# Altium PCB PCB.PcbDoc (part 2 of 3)
Units mil, origin at the board's own origin, x right, y up, seen from the top; angles counter-clockwise.
Board outline 2000 x 1595 mil, 2 copper layers (Top Layer, Bottom Layer); 191 components, 134 nets, 778 pads, 0 vias.
Unrouted connection lines stored in the file: 439.
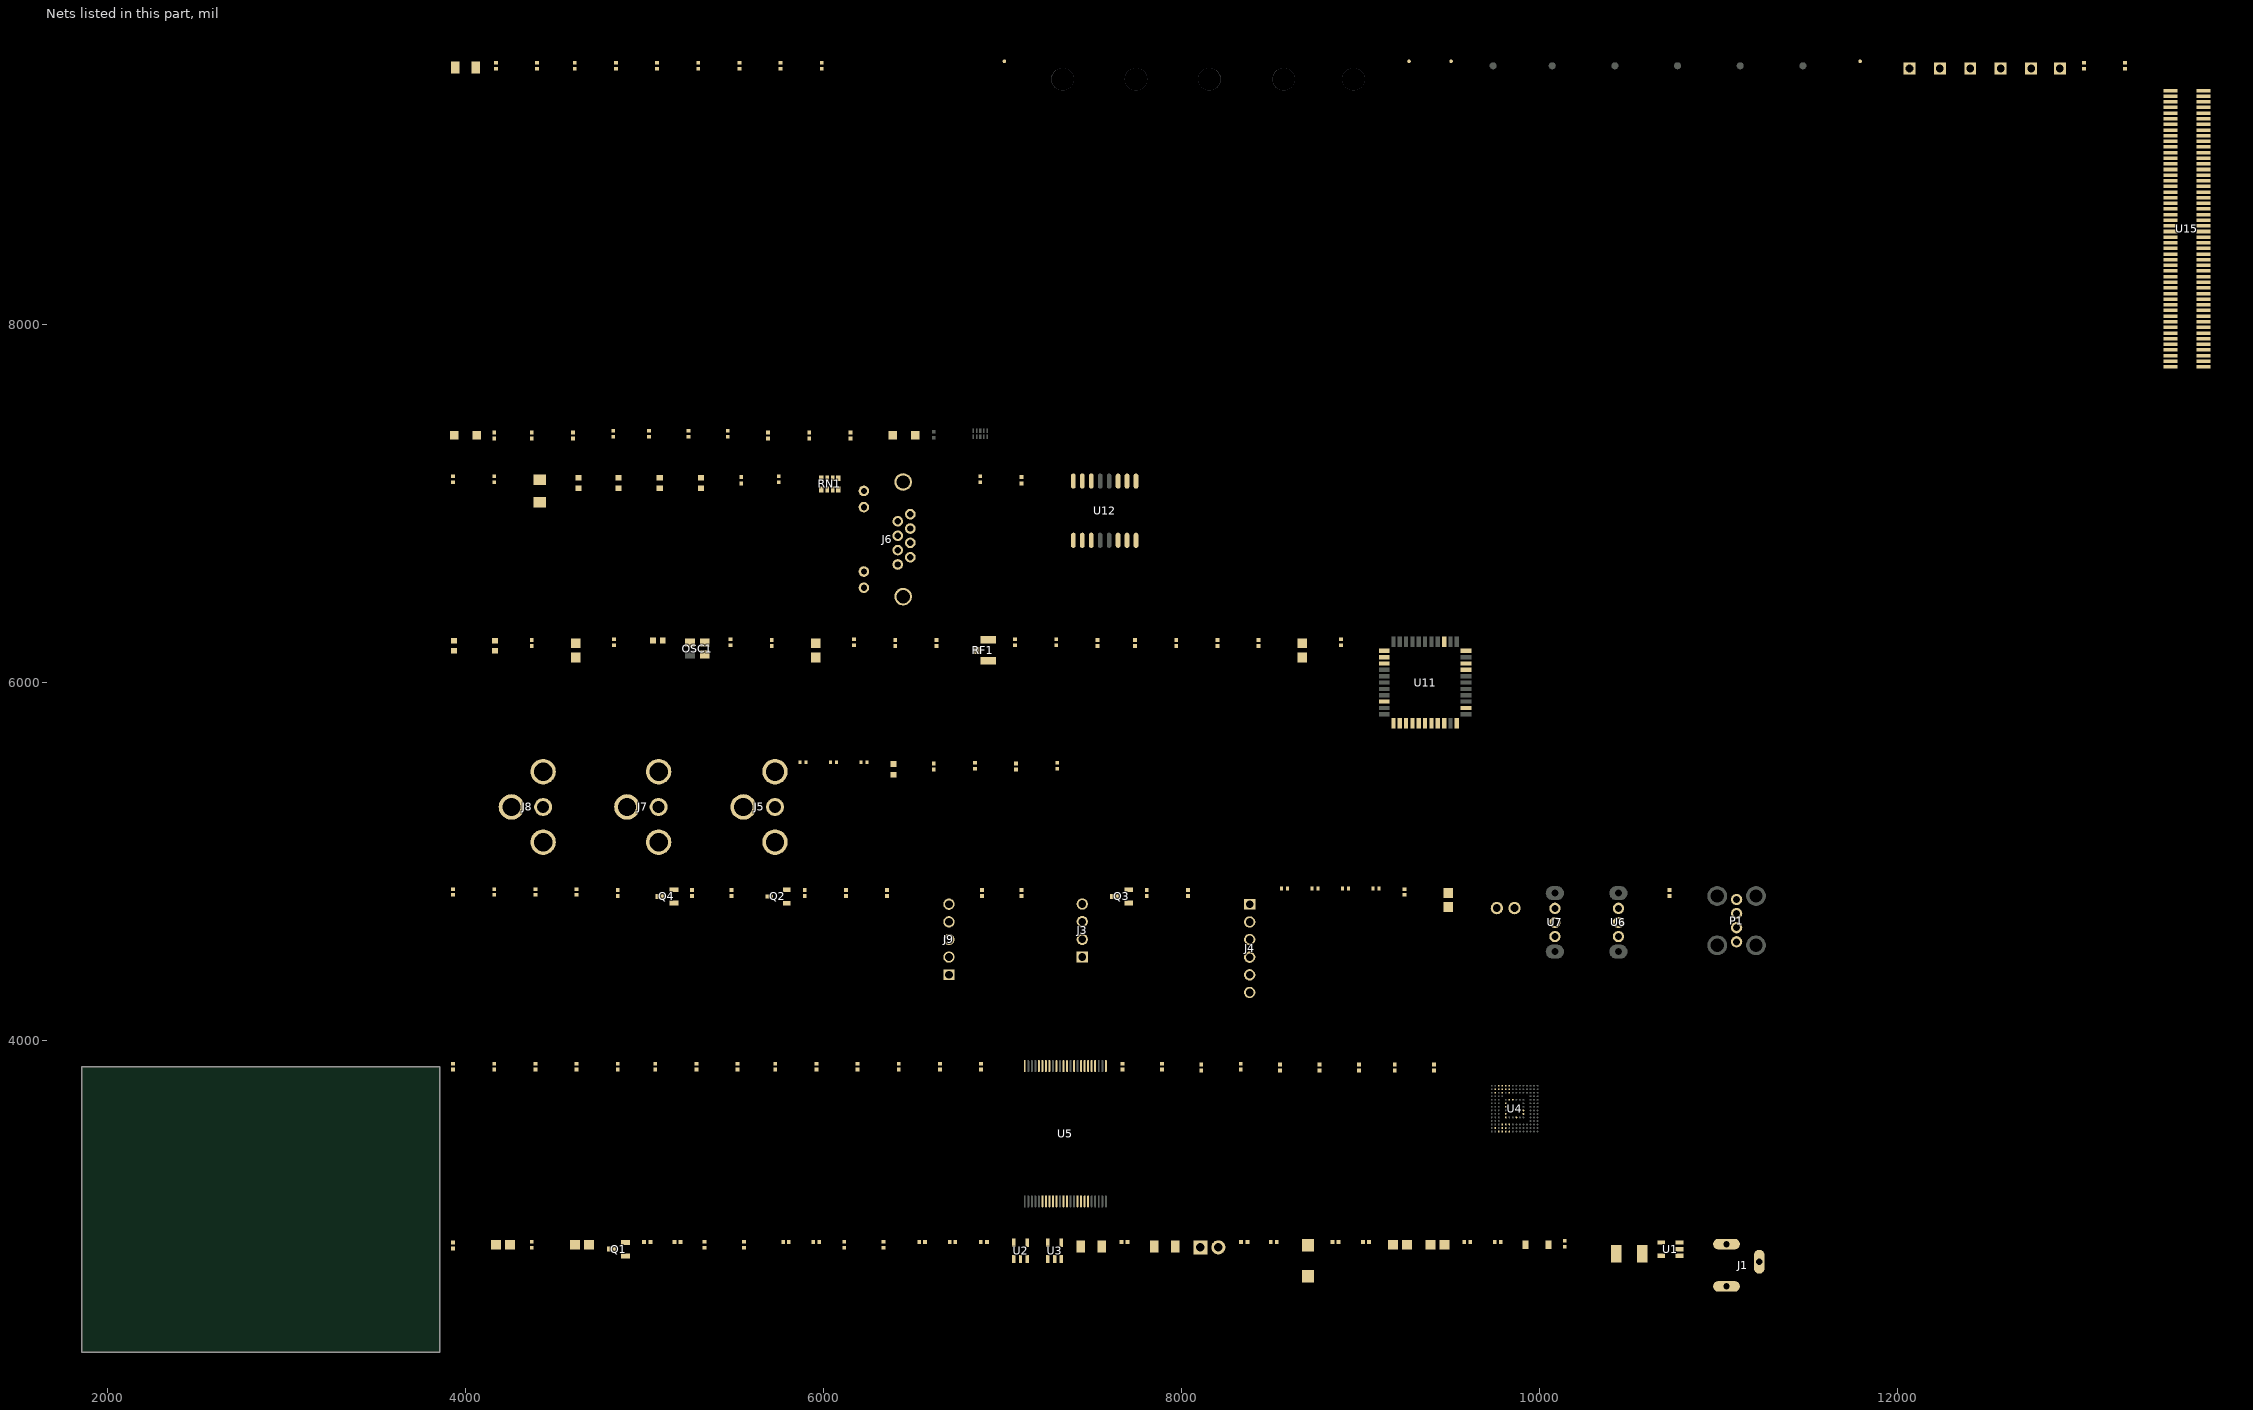
[diagram p2: the nets of this part, all layers, seen from the top]

## Part data
C1 C3 C14 C16 C35 C43 C47 C50: library part CGA0805X5R106K500MT, "容值:10uF;精度:±10%;额定电压:50V;温度系数:X5R;", JLCPCB Part Class="Extended Part", LCSC Part Name="10uF ±10% 50V", Manufacturer=HRE(芯声), Temperature Coefficient=X5R, Tolerance=±10%, Voltage Rating=50V, AddInBom=yes, ConvertToPcb=yes, Datasheet=https://item.szlcsc.com/datasheet/CGA0805X5R106K500MT/7062595.html, Device=CGA0805X5R106K500MT, FootprintName=C0805, ModelName=C0805_L2.0-W1.3-H1.3, Supplier=LCSC, Supplier Footprint=0805, Symbol=CGA0805X5R106K500MT
  C1 C3 C43 C47 C50: 3D Model=1ba041120af144c991958decab20d241聨0819f05c4eef4c71ace90d822a990e87, 3D Model Transform=78.74,51.181,0,0,0,0,0,0.0005,0, Manufacturer Part=CGA0805X5R106K500MT, Supplier Part=C6119889
  C14 C16 C35: ManufacturerPart=CGA0805X5R106K500MT, ModelId=1ba041120af144c991958decab20d241聨0819f05c4eef4c71ace90d822a990e87, ModelTransform=78.74,51.181,0,0,0,0,0,0.0005,0, SupplierPart=C6119889
C2 C4 C8 C11 C12 C13 C15 C17 C18 C20 C23 C24 C25 C26 C29 C30 C31 C32 C33 C36 C44 C45 C46 C48 C49 C51 C52 C53 C55 C56 C57 C58 C62 C63 C64 C65 C66 C67 C68: library part CL05B104KO5NNNC, "容值:100nF;精度:±10%;额定电压:16V;温度系数:X7R;", JLCPCB Part Class="Basic Part", LCSC Part Name="100nF ±10% 16V", Manufacturer=SAMSUNG(三星), Temperature Coefficient=X7R, Tolerance=±10%, Voltage Rating=16V, AddInBom=yes, ConvertToPcb=yes, Datasheet=https://item.szlcsc.com/datasheet/CL05B104KO5NNNC/1877.html, Device=CL05B104KO5NNNC, FootprintName=C0402, ModelName=C0402_L1.0-W0.5-H0.5, Supplier=LCSC, Supplier Footprint=0402, Symbol=CL05B104KO5NNNC
  C2 C4 C20 C23 C24 C25 C26 C30 C31 C32 C33 C44 C48 C51 C52 C53 C55 C56 C57 C58 C62 C63 C64 C65 C66 C67 C68: 3D Model=36a51122f27c49738f86b3bfa98863e0聨0819f05c4eef4c71ace90d822a990e87, 3D Model Transform=39.37,19.685,0,0,0,0,0,0,0, Manufacturer Part=CL05B104KO5NNNC, Supplier Part=C1525
  C8 C11 C15 C17 C18 C29 C36: ManufacturerPart=CL05B104KO5NNNC, ModelId=36a51122f27c49738f86b3bfa98863e0聨0819f05c4eef4c71ace90d822a990e87, ModelTransform=39.37,19.685,0,0,0,0,0,0,0, SupplierPart=C1525
  C12 C13 C49: ManufacturerPart=CL05B104KO5NNNC, ModelId=36a51122f27c49738f86b3bfa98863e0聨0819f05c4eef4c71ace90d822a990e87, ModelTransform=39.37,19.685,0,0,0,0,0,0,0
  C45 C46: 3D Model=36a51122f27c49738f86b3bfa98863e0聨0819f05c4eef4c71ace90d822a990e87, 3D Model Transform=39.37,19.685,0,0,0,0,0,0,0, Manufacturer Part=CL05B104KO5NNNC
C5: library part FCC0402N220J500AT, "容值:22pF;精度:±5%;额定电压:50V;温度系数:C0G;", JLCPCB Part Class="Extended Part", LCSC Part Name="22pF ±5% 50V", Manufacturer=FOJAN(富捷), Temperature Coefficient=C0G, Tolerance=±5%, Voltage Rating=50V, 3D Model=36a51122f27c49738f86b3bfa98863e0聨0819f05c4eef4c71ace90d822a990e87, 3D Model Transform=39.37,19.685,0,0,0,0,0,0,0, AddInBom=yes, ConvertToPcb=yes, Datasheet=https://item.szlcsc.com/datasheet/FCC0402N220J500AT/5747021.html, Device=FCC0402N220J500AT, FootprintName=C0402, Manufacturer Part=FCC0402N220J500AT, ModelName=C0402_L1.0-W0.5-H0.5, Supplier=LCSC, Supplier Footprint=0402, Supplier Part=C5137569, Symbol=FCC0402N220J500AT
C6 C7 C9 C10 C41 C42: library part GRM155C61E475ME15D, "容值:4.7uF;精度:±20%;额定电压:25V;温度系数:-;", JLCPCB Part Class="Extended Part", LCSC Part Name="4.7uF ±20% 25V", Manufacturer=muRata(村田), Temperature Coefficient=-, Tolerance=±20%, Voltage Rating=25V, AddInBom=yes, ConvertToPcb=yes, Datasheet=https://item.szlcsc.com/datasheet/GRM155C61E475ME15D/6643118.html, Device=GRM155C61E475ME15D, FootprintName=C0402, ManufacturerPart=GRM155C61E475ME15D, ModelId=36a51122f27c49738f86b3bfa98863e0聨0819f05c4eef4c71ace90d822a990e87, ModelName=C0402_L1.0-W0.5-H0.5, ModelTransform=39.37,19.685,0,0,0,0,0,0,0, Supplier=LCSC, Supplier Footprint=0402, SupplierPart=C5718966, Symbol=GRM155C61E475ME15D
C19 C21 C22 C27 C28 C59 C60 C61: library part CGA0402X5R105K500GT, "容值:1uF;精度:±10%;额定电压:50V;温度系数:X5R;", JLCPCB Part Class="Extended Part", LCSC Part Name="1uF ±10% 50V", Manufacturer=HRE(芯声), Temperature Coefficient=X5R, Tolerance=±10%, Voltage Rating=50V, AddInBom=yes, ConvertToPcb=yes, Datasheet=https://item.szlcsc.com/datasheet/CGA0402X5R105K500GT/7062517.html, Device=CGA0402X5R105K500GT, FootprintName=C0402, ModelName=C0402_L1.0-W0.5-H0.5, Supplier=LCSC, Supplier Footprint=0402, Symbol=CGA0402X5R105K500GT
  C19 C27 C28: ManufacturerPart=CGA0402X5R105K500GT, ModelId=36a51122f27c49738f86b3bfa98863e0聨0819f05c4eef4c71ace90d822a990e87, ModelTransform=39.37,19.685,0,0,0,0,0,0,0, SupplierPart=C6119811
  C21 C22 C59 C60 C61: 3D Model=36a51122f27c49738f86b3bfa98863e0聨0819f05c4eef4c71ace90d822a990e87, 3D Model Transform=39.37,19.685,0,0,0,0,0,0,0, Manufacturer Part=CGA0402X5R105K500GT, Supplier Part=C6119811
C34: library part PB16V330M6X11, "容值:330uF;精度:±20%;额定电压:16V;纹波电流:4.1A@100kHz;等效串联电阻(ESR):16mΩ@100kHz;类型:聚合物;", Equivalent Series Resistance(ESR)=16mΩ@100kHz, JLCPCB Part Class="Extended Part", LCSC Part Name="330uF ±20% 16V", Manufacturer=JIERR(捷而瑞), Operating Temperature=-55℃~+105℃, Ripple Current=4.1A@100kHz, Tolerance=±20%, Voltage Rating=16V, AddInBom=yes, ConvertToPcb=yes, Datasheet=https://item.szlcsc.com/datasheet/PB16V330M6X11/54649573.html, Device=PB16V330M6X11, Diameter=6.3mm, FootprintName=CAP-TH_BD6.3-P2.50-D0.6-FD-3, Height - Seated (Max)=11mm, Lifetime=5000hrs@105℃, ManufacturerPart=PB16V330M6X11, Pin Spacing=2.5mm, Supplier=LCSC, Supplier Footprint=插件,D6.3xL11mm, SupplierPart=C51934161, Symbol=PB16V330M6X11, Type=聚合物
C37 C38 C39 C40: library part CL05C100JB5NNNC, "容值:10pF;精度:±5%;额定电压:50V;温度系数:C0G;", JLCPCB Part Class="Basic Part", LCSC Part Name="10pF ±5% 50V", Manufacturer=SAMSUNG(三星), Temperature Coefficient=C0G, Tolerance=±5%, Voltage Rating=50V, 3D Model=36a51122f27c49738f86b3bfa98863e0聨0819f05c4eef4c71ace90d822a990e87, 3D Model Transform=39.37,19.685,0,0,0,0,0,0,0, AddInBom=yes, ConvertToPcb=yes, Datasheet=https://item.szlcsc.com/datasheet/CL05C100JB5NNNC/33914.html, Device=CL05C100JB5NNNC, FootprintName=C0402, Manufacturer Part=CL05C100JB5NNNC, ModelName=C0402_L1.0-W0.5-H0.5, Supplier=LCSC, Supplier Footprint=0402, Supplier Part=C32949, Symbol=CL05C100JB5NNNC
C54: library part CL31B105KBHNNNE, "容值:1uF;精度:±10%;额定电压:50V;温度系数:X7R;", JLCPCB Part Class="Basic Part", LCSC Part Name="1uF ±10% 50V", Manufacturer=SAMSUNG(三星), Temperature Coefficient=X7R, Tolerance=±10%, Voltage Rating=50V, AddInBom=yes, ConvertToPcb=yes, Datasheet=https://item.szlcsc.com/datasheet/CL31B105KBHNNNE/2200.html, Device=CL31B105KBHNNNE, FootprintName=C1206, ManufacturerPart=CL31B105KBHNNNE, ModelId=e4be705b945545a48e666415e3682bd8聨0819f05c4eef4c71ace90d822a990e87, ModelName=C1206_L3.2-W1.6-H1.3, ModelTransform=125.984,62.992,0,0,0,0,0,0,0, Supplier=LCSC, Supplier Footprint=1206, SupplierPart=C1848, Symbol=CL31B105KBHNNNE
D1: library part BZT52C5V6_C19077402, "二极管配置:独立式;稳压值(标称值):5.6V;稳压值(范围):5.32V~5.88V;耗散功率(Pd):350mW;", JLCPCB Part Class="Extended Part", LCSC Part Name=表面贴装齐纳二极管, Manufacturer=R+O(宏嘉诚), Operating Junction Temperature Range=-55℃~+150℃, Pd - Power Dissipation=350mW, Reverse Leakage Current (Ir)=1uA@2.0V, Zener Voltage(Nom)=5.6V, Zener Voltage(Range)=5.32V~5.88V, AddInBom=yes, ConvertToPcb=yes, Datasheet=https://item.szlcsc.com/datasheet/BZT52C5V6/20275487.html, Device=BZT52C5V6_C19077402, Diode Configuration=独立式, FootprintName=SOD-123_L2.7-W1.6-LS3.7-RD, Impedance(Zzk)=400Ω, Impedance(Zzt)=40Ω, ManufacturerPart=BZT52C5V6, ModelId=ad7e39f9e5534b3c96ffdc5532ebb493聨0819f05c4eef4c71ace90d822a990e87, ModelName=SOD-123_L2.7-W1.6-H1.4-LS3.7, ModelTransform=146.026,62.992,0,180,0,0,0.0005,0,0, Supplier=LCSC, Supplier Footprint=SOD-123, SupplierPart=C19077402, Symbol=BZT52C5V6_C19077402
D2: library part 1N5819_C437199, "正向压降(Vf):500mV@1A;直流反向耐压(Vr):40V;整流电流:1A;", Current - Rectified=1A, JLCPCB Part Class="Extended Part", LCSC Part Name="KEXIN(科信)原型号 SS14,后续变更为 1N5819，丝印不变。 电压:40V 电流:1A", Manufacturer=KEXIN(科信), Non-Repetitive Peak Forward Surge Current=40A, Operating Junction Temperature Range=-60℃~+125℃, Voltage - DC Reverse(Vr)=40V, Voltage - Forward(Vf@If)=500mV@1A, AddInBom=yes, ConvertToPcb=yes, Datasheet=https://item.szlcsc.com/datasheet/1N5819/435098.html, Device=1N5819_C437199, FootprintName=SMA_L4.4-W2.6-LS5.0-RD, ManufacturerPart=1N5819, ModelId=a2d22152f8d5421c8e96dbd56af7c345聨0819f05c4eef4c71ace90d822a990e87, ModelName=SMA_L4.4-W2.6-LS5.0-RD, ModelTransform=204.724,98.425,0,0,0,0,0,0,0, Supplier=LCSC, Supplier Footprint=DO-214AC(SMA), SupplierPart=C437199, Symbol=1N5819_C437199
D3 D4 D5 D9 ESD1: "反向截止电压(Vrwm):5V;钳位电压:12.5V;峰值脉冲功率(Ppp):80W@8/20us;击穿电压:6V;", Clamping Voltage=12.5V, JLCPCB Part Class="Extended Part", Junction Capacitance=15pF, LCSC Part Name="ESD 5V截止", Manufacturer=Leiditech(雷卯电子), Peak Pulse Power Dissipation (Ppp)=80W@8/20us, Reverse Leakage Current (Ir)=500nA, Reverse Stand-Off Voltage (Vrwm)=5V, Voltage - Breakdown=6V, AddInBom=yes, ConvertToPcb=yes, Datasheet=https://item.szlcsc.com/datasheet/ESD9B5VL-2/5766708.html, Device=ESD9B5VL-2, FootprintName=DFN1006-2L-BI, level of protection="IEC 61000-4-5；IEC 61000-4-2", ModelId=2bdbcca3b35b49c5a8ae725a08658930聨0819f05c4eef4c71ace90d822a990e87, ModelName=DFN1006-2L-BI, ModelTransform=40.1574,24.4094,0,0,0,0,0,0,0, Supplier=LCSC, Supplier Footprint=DFN1006-2, SupplierPart=C5144823, Symbol=ESD9B5VL-2, Type=ESD
  D3 D4 D5 D9: ManufacturerPart=ESD9B5VL-2
  ESD1: Manufacturer Part=ESD9B5VL-2
D6 D7 D8 D11 D12 D13 D14: "反向截止电压(Vrwm):5V;峰值脉冲电流(Ipp):8A;击穿电压:5.6V;", Breakdown Voltage=5.6V, JLCPCB Part Class="Extended Part", LCSC Part Name=丝印C, Manufacturer=MSKSEMI(美森科), Peak Pulse Current (Ipp)=8A, Reverse Stand-Off Voltage (Vrwm)=5V, AddInBom=yes, ConvertToPcb=yes, Datasheet=https://atta.szlcsc.com/upload/public/pdf/source/20230621/69F6BD434835CFDE06A31A18B4149936.pdf, Device=ESD5451X-MS, FootprintName=DFN1006-2L-BI, ModelName=DFN1006-2L-BI, Supplier=LCSC, Supplier Footprint=DFN1006-2L, Symbol=ESD5451X-MS, Type=ESD
  D6 D7 D8: 3D Model=2bdbcca3b35b49c5a8ae725a08658930聨0819f05c4eef4c71ace90d822a990e87, 3D Model Transform=40.1574,24.4094,0,0,0,0,0,0,0, Manufacturer Part=ESD5451X-MS, Supplier Part=C7379960
  D11 D12 D13 D14: ManufacturerPart=ESD5451X-MS, ModelId=2bdbcca3b35b49c5a8ae725a08658930聨0819f05c4eef4c71ace90d822a990e87, ModelTransform=40.1574,24.4094,0,0,0,0,0,0,0, SupplierPart=C7379960
D10 D15: "二极管配置:独立式;正向压降(Vf):490mV@1A;直流反向耐压(Vr):40V;整流电流:1A;", Current - Rectified=1A, JLCPCB Part Class="Extended Part", LCSC Part Name="电压:40V 电流:1A", Manufacturer=Slkor(萨科微), Non-Repetitive Peak Forward Surge Current=10A, Reverse Leakage Current (Ir)=4uA@40V, Voltage - DC Reverse(Vr)=40V, Voltage - Forward(Vf@If)=490mV@1A, 3D Model=b8c4b3388b3d4c198b22b876116f592b聨0819f05c4eef4c71ace90d822a990e87, 3D Model Transform=145.669,70.866,0,0,0,0,0,0,0, AddInBom=yes, ConvertToPcb=yes, Datasheet=https://item.szlcsc.com/datasheet/XBS104S14/5856509.html, Device=XBS104S14, Diode Configuration=独立式, FootprintName=SOD-123FL_L2.8-W1.8-LS3.7-RD, Manufacturer Part=XBS104S14, ModelName=SOD-123FL_L2.8-W1.8-LS3.7-RD, Supplier=LCSC, Supplier Footprint=SOD-123FL, Supplier Part=C5185949, Symbol=XBS104S14
FB1 FB2: "阻抗@频率:0Ω@100MHz;直流电阻(DCR):10mΩ;", Current Rating=6A, DC Resistance(DCR)=10mΩ, Impedance @ Frequency=0Ω@100MHz, JLCPCB Part Class="Extended Part", LCSC Part Name="单路 0603磁珠 阻抗0Ω@100MHz", Manufacturer=FH(风华), Operating Temperature=-55℃~+125℃, AddInBom=yes, ConvertToPcb=yes, Datasheet=https://item.szlcsc.com/datasheet/CBM160808U000T/373685.html, Device=CBM160808U000T, FootprintName=L0603, ManufacturerPart=CBM160808U000T, ModelId=2bc5ec593d464d6ba9807aec0b5673c2聨0819f05c4eef4c71ace90d822a990e87, ModelName=L0603_L1.6-W0.8-H0.5_BEAD, ModelTransform=62.992,31.496,0,180,0,0,0.094,0.629,0, Number of Circuits=1, Supplier=LCSC, Supplier Footprint=0603, SupplierPart=C394410, Symbol=CBM160808U000T
H1 H2 H3 H4 H5 H6: "插针结构:1x1P;间距:2.54mm;行距:-;圆针/方针:方针;安装方式:直插;排数:单排;总PIN位数:1P;额定电流:3A;额定电压:250V;配合针长度:6mm;塑高:2.5mm;端接针长度:3mm;触头材质:黄铜;触头镀层:-;工作温度:-40℃~+105℃;颜色:黑色;", Color=黑色, Current Rating=3A, JLCPCB Part Class="Extended Part", LCSC Part Name="1x1P 间距:2.54mm 方针 直插", Manufacturer=XFCN(兴飞), Operating Temperature=-40℃~+105℃, Voltage Rating (Max)=250V, 3D Model=efa57846279b44bfa0a28253a2c74e33聨0819f05c4eef4c71ace90d822a990e87, 3D Model Transform=100,100,0,0,0,0,0,0,-118.11, AddInBom=yes, Circluar Pins/Square Pins=方针, Contact Material=黄铜, Contact Plating=-, ConvertToPcb=yes, Datasheet=https://item.szlcsc.com/datasheet/PZ254V-11-01P/502956.html, Device=PZ254V-11-01P, FootprintName=HDR-TH_1P-P2.54-V-M, Insulation Height=2.5mm, Length of End Connection Pin=3mm, Length of Mating Pin=6mm, Manufacturer Part=PZ254V-11-01P, ModelName=HDR2.54-M-LI-1X1P, Mounting Type=直插, Number of Pins=1P, Number of Rows=单排, Pin Structure=1x1P, Pitch=2.54mm, Row Spacing=-, Supplier=LCSC, Supplier Footprint=插件,P=2.54mm, Supplier Part=C492400, Symbol=PZ254V-11-01P
J1: "连接器类型:DC电源插座;安装方式:弯插;触点内径:2mm;触点外径:6.4mm;额定电流:3A;额定电压:30V;工作温度:-20℃~+70℃;", Current Rating=3A, JLCPCB Part Class="Extended Part", LCSC Part Name="DC电源插座 内径:2mm 外径:6.4mm", Manufacturer=XUNPU(讯普), Operating Temperature=-20℃~+70℃, Voltage Rating (Max)=30V, AddInBom=yes, Connector Type=DC电源插座, ConvertToPcb=yes, Datasheet=https://item.szlcsc.com/datasheet/DC-005-A200/763564.html, Device=DC-005-A200, FootprintName=DC-IN-TH_DC-005-A200, Inside Contact Diameter=2mm, ManufacturerPart=DC-005-A200, ModelId=1321cdbe1dc84555a9684967491c8670聨0819f05c4eef4c71ace90d822a990e87, ModelName=DC-IN-TH_DC-005-A200, ModelTransform=553.149,368.14887,0,0,0,0,-137.795,85.63,-161.417, Mounting Type=弯插, Outside Contact Diameter=6.4mm, Supplier=LCSC, Supplier Footprint=插件, SupplierPart=C720557, Symbol=DC-005-A200
J2: "插针结构:1x2P;间距:2.54mm;行距:-;圆针/方针:方针;安装方式:直插;排数:单排;总PIN位数:2P;额定电流:3A;额定电压:250V;配合针长度:6mm;塑高:2.5mm;端接针长度:3mm;触头材质:黄铜;触头镀层:-;工作温度:-40℃~+105℃;颜色:黑色;", Color=黑色, Current Rating=3A, JLCPCB Part Class="Extended Part", LCSC Part Name="1x2P 间距:2.54mm 方针 直插", Manufacturer=XFCN(兴飞), Operating Temperature=-40℃~+105℃, Voltage Rating (Max)=250V, AddInBom=yes, Circluar Pins/Square Pins=方针, Contact Material=黄铜, Contact Plating=-, ConvertToPcb=yes, Datasheet=https://item.szlcsc.com/datasheet/PZ254V-11-02P/502957.html, Device=PZ254V-11-02P, FootprintName=HDR-TH_2P-P2.54-V-M, Insulation Height=2.5mm, Length of End Connection Pin=3mm, Length of Mating Pin=6mm, ManufacturerPart=PZ254V-11-02P, ModelId=e35305ec3aa84b66b849f914b715e73f聨0819f05c4eef4c71ace90d822a990e87, ModelName=HDR2.54-M-LI-1X2P, ModelTransform=200,100,0,0,0,0,0,0,-118.11, Mounting Type=直插, Number of Pins=2P, Number of Rows=单排, Pin Structure=1x2P, Pitch=2.54mm, Row Spacing=-, Supplier=LCSC, Supplier Footprint=插件,P=2.54mm, SupplierPart=C492401, Symbol=PZ254V-11-02P
J3: "插针结构:1x4P;间距:2.5mm;安装方式:直插;参考系列:XH;总PIN数:4P;排数:1;每排PIN数:4;行距:-;额定电流:3A;触头材质:黄铜;触头镀层:锡;工作温度:-25℃~+85℃;", Color=白色, Current Rating=3A, Flame Retardant Rating=UL94V-0, JLCPCB Part Class="Extended Part", LCSC Part Name="1x4P 间距:2.5mm 直插 系列:XH", Manufacturer=Megastar(兆星), Operating Temperature=-25℃~+85℃, Voltage Rating=250V, 3D Model=5458b55d28744a3c82c1e0e5bffe4e87聨0819f05c4eef4c71ace90d822a990e87, 3D Model Transform=492.125,224.409,0,180,0,0,0,17.717,-118.11, AddInBom=yes, Contact Material=黄铜, Contact Plating=锡, ConvertToPcb=yes, Datasheet=https://item.szlcsc.com/datasheet/ZX-XH2.54-4PZZ/8427551.html, Device=ZX-XH2.54-4PZZ, FootprintName=CONN-TH_4P-P2.50_4PIN, Manufacturer Part=ZX-XH2.54-4PZZ, ModelName=CONN-TH_4P-P2.50_4PIN, Mounting Type=直插, Number of Pins=4P, Number of PINs Per Row=4, Number of Rows=1, Pins Structure=1x4P, Pitch=2.5mm, Plastic Material=PA66, Reference Series=XH, Row Spacing=-, Supplementary Features=-, Supplier=LCSC, Supplier Footprint=插件,P=2.5mm, Supplier Part=C7429634, Symbol=ZX-XH2.54-4PZZ, X-Length of Bottom Edge on Board (Spacing Line)=12.5mm, Y-Width of Bottom Edge on Board=5.9mm, Z-Height of the Board=7mm
J4: "插针结构:1x6P;间距:2.5mm;安装方式:直插;参考系列:XH;总PIN数:6P;排数:1;每排PIN数:6;行距:-;额定电流:3A;触头材质:黄铜;触头镀层:锡;工作温度:-25℃~+85℃;", Color=白色, Current Rating=3A, Flame Retardant Rating=UL94V-0, JLCPCB Part Class="Extended Part", LCSC Part Name="1x6P 间距:2.5mm 直插 系列:XH", Manufacturer=Megastar(兆星), Operating Temperature=-25℃~+85℃, Voltage Rating=250V, 3D Model=69bbd5a736b94698bef26e8b4cdae04d聨0819f05c4eef4c71ace90d822a990e87, 3D Model Transform=688.975,232.6767,0,0,0,0,0,14.528,-133.858, AddInBom=yes, Contact Material=黄铜, Contact Plating=锡, ConvertToPcb=yes, Datasheet=https://item.szlcsc.com/datasheet/ZX-XH2.54-6PZZ/8427553.html, Device=ZX-XH2.54-6PZZ, FootprintName=CONN-TH_6P-P2.50_ZX-XH2.54-6PZZ, Manufacturer Part=ZX-XH2.54-6PZZ, ModelName=CONN-TH_6P-P2.50_ZX-XH2.54-6PZZ, Mounting Type=直插, Number of Pins=6P, Number of PINs Per Row=6, Number of Rows=1, Pins Structure=1x6P, Pitch=2.5mm, Plastic Material=PA66, Reference Series=XH, Row Spacing=-, Supplementary Features=-, Supplier=LCSC, Supplier Footprint=插件,P=2.5mm, Supplier Part=C7429636, Symbol=ZX-XH2.54-6PZZ, X-Length of Bottom Edge on Board (Spacing Line)=17.5mm, Y-Width of Bottom Edge on Board=5.9mm, Z-Height of the Board=7mm
J5 J7 J8: "RCA插孔", JLCPCB Part Class="Extended Part", Manufacturer=CUI, AddInBom=yes, ConvertToPcb=yes, Datasheet=https://item.szlcsc.com/datasheet/RCJ-014/5566715.html, Device=RCJ-014, FootprintName=CONN-TH_RCJ-013, LCSC Part Name=RCA插孔, ManufacturerPart=RCJ-014, ModelId=253d1bbf7df34a00af0459c95b34318f聨0819f05c4eef4c71ace90d822a990e87, ModelName=CONN-TH_RCJ-013, ModelTransform=570.865,456.692,0,0,0,0,-147.047,0,-177.165, Supplier=LCSC, Supplier Footprint=-, SupplierPart=C4991844, Symbol=RCJ-014
J6: "连接器类型:RJ45插座;安装方式:弯插;端口数量:1;LED:带LED;屏蔽:有屏蔽;等级:-;触头材质:磷青铜;触头镀层:金;工作温度:0℃~+70℃;", JLCPCB Part Class="Extended Part", LCSC Part Name="弯插 带LED", Manufacturer=Ckmtw(灿科盟), Operating Temperature=0℃~+70℃, Ratings=-, AddInBom=yes, Connector Type=RJ45插座, Contact Material=磷青铜, Contact Plating=金, ConvertToPcb=yes, Datasheet=https://item.szlcsc.com/datasheet/R-RJ45R08P-C004/360866.html, Device=R-RJ45R08P-C004, FootprintName=RJ45-TH_R-RJ45R08P-C004, LED=带LED, ManufacturerPart=R-RJ45R08P-C004, ModelId=7d68f79fef814152a52c058157038b8b聨0819f05c4eef4c71ace90d822a990e87, ModelName=RJ45-TH_L16.3-W15.8-H13.1, ModelTransform=647.6365,631.889,0,0,0,0,0,-129.921,-137.795, Mounting Type=弯插, Number of Ports=1, Shielding=有屏蔽, Supplementary Features=有弹片, Supplier=LCSC, Supplier Footprint=弯插, SupplierPart=C386759, Symbol=R-RJ45R08P-C004
J9: "插针结构:1x5P;间距:2.5mm;安装方式:直插;参考系列:XH;总PIN数:5P;排数:1;每排PIN数:5;行距:-;额定电流:3A;触头材质:黄铜;触头镀层:锡;工作温度:-25℃~+85℃;", Color=白色, Current Rating=3A, Flame Retardant Rating=UL94V-0, JLCPCB Part Class="Extended Part", LCSC Part Name="1x5P 间距:2.5mm 直插 系列:XH", Manufacturer=Megastar(兆星), Operating Temperature=-25℃~+85℃, Voltage Rating=250V, AddInBom=yes, Contact Material=黄铜, Contact Plating=锡, ConvertToPcb=yes, Datasheet=https://item.szlcsc.com/datasheet/ZX-XH2.54-5PZZ/8427552.html, Device=ZX-XH2.54-5PZZ, FootprintName=CONN-TH_5P-P2.50_ZX-XH2.54-5PZZ, ManufacturerPart=ZX-XH2.54-5PZZ, ModelId=d05584c4f2494e6996f34343461d4ab0聨0819f05c4eef4c71ace90d822a990e87, ModelName=CONN-TH_5P-P2.50_ZX-XH2.54-5PZZ, ModelTransform=590.55,232.6767,0,0,0,0,0,14.528,-133.858, Mounting Type=直插, Number of Pins=5P, Number of PINs Per Row=5, Number of Rows=1, Pins Structure=1x5P, Pitch=2.5mm, Plastic Material=PA66, Reference Series=XH, Row Spacing=-, Supplementary Features=-, Supplier=LCSC, Supplier Footprint=插件,P=2.5mm, SupplierPart=C7429635, Symbol=ZX-XH2.54-5PZZ, X-Length of Bottom Edge on Board (Spacing Line)=15mm, Y-Width of Bottom Edge on Board=5.9mm, Z-Height of the Board=7mm
L1: library part SRG0420-2R2-M, "电感值:2.2uH;精度:±20%;额定电流:4A;饱和电流(Isat):5A;类型:一体成型电感;", Current - Saturation(Isat)=5A, Current Rating=4A, DC Resistance(DCR)=49mΩ, JLCPCB Part Class="Extended Part", LCSC Part Name="2.2μH ±20% 5A", Manufacturer=JIERR(捷而瑞), Tolerance=±20%, AddInBom=yes, ConvertToPcb=yes, Datasheet=https://item.szlcsc.com/datasheet/SRG0420-2R2-M/56628161.html, Device=SRG0420-2R2-M, FootprintName=IND-SMD_L4.6-W4.1_MHCI04015, Manufacturer Part=SRG0420-2R2-M, Supplier=LCSC, Supplier Footprint=SMD,4.6x4.1mm, Supplier Part=C53462916, Symbol=SRG0420-2R2-M, Type=一体成型电感
L2: "阻抗@频率:120Ω@100MHz;误差:±25%;直流电阻(DCR):200mΩ;", Current Rating=500mA, DC Resistance(DCR)=200mΩ, Impedance @ Frequency=120Ω@100MHz, JLCPCB Part Class="Extended Part", LCSC Part Name="单路 0603磁珠 阻抗120Ω@100MHz", Manufacturer=TDK, Operating Temperature=-55℃~+125℃, Tolerance=±25%, AddInBom=yes, ConvertToPcb=yes, Datasheet=https://item.szlcsc.com/datasheet/MMZ1608S121ATA00/147538.html, Device=MMZ1608S121ATA00, FootprintName=L0603, ManufacturerPart=MMZ1608S121ATA00, ModelId=2bc5ec593d464d6ba9807aec0b5673c2聨0819f05c4eef4c71ace90d822a990e87, ModelName=L0603_L1.6-W0.8-H0.5_BEAD, ModelTransform=62.992,31.496,0,180,0,0,0.094,0.629,0, Number of Circuits=1, Supplier=LCSC, Supplier Footprint=0603, SupplierPart=C136223, Symbol=MMZ1608S121ATA00
MARK1 MARK2 MARK3 MARK4 MARK5 MARK6: library part Mark-Point, "Mark点", AddInBom=no, ConvertToPcb=yes, Device=Mark-Point, FootprintName=Mark-Point-1mm, Symbol=Mark-Point
OSC1: JLCPCB Part Class="Extended Part", LCSC Part Name="24M ±20ppm 1.8~3.3V", Manufacturer=HUAXIN(华昕), AddInBom=yes, ConvertToPcb=yes, Datasheet=https://item.szlcsc.com/datasheet/YF4024M00033001/8591324.html, Device=YF4024M00033001, FootprintName=OSC-SMD_4P-L3.2-W2.5-BL_1C210000BB0F, ManufacturerPart=YF4024M00033001, ModelId=abac09874cf942b1977c54e82ea110d7聨0819f05c4eef4c71ace90d822a990e87, ModelName=OSC-SMD_4P-L3.2-W2.5-BL_1C210000BB0F, ModelTransform=126.063,98.504,0,0,0,0,0,0,0, Supplier=LCSC, Supplier Footprint=SMD3225-4P, SupplierPart=C7503132, Symbol=YF4024M00033001
P1: "连接器类型:Type-A;协议标准:USB 2.0;公母:母;安装方式:侧插;触点数量:4P;端口数量:1;额定电流 - 电源:1.5A;工作温度:-20℃~+70℃;", Current Rating-Power=1.5A, Detection color=白色, JLCPCB Part Class="Extended Part", LCSC Part Name="Type-A 母 侧插", Manufacturer=XUNPU(讯普), Operating Temperature=-20℃~+70℃, Voltage Rating=30V, AddInBom=yes, Connector Type=Type-A, ConvertToPcb=yes, Datasheet=https://item.szlcsc.com/datasheet/USB-226-BRY/763530.html, Device=USB-226-BRY, FootprintName=USB-A-TH_USB-226-BRY, Gender=母, Length=19.4mm, ManufacturerPart=USB-226-BRY, ModelId=688292054bf045d3989335cf0c7d2341聨0819f05c4eef4c71ace90d822a990e87, ModelName=USB-A-TH_USB-226-BRY, ModelTransform=279.527,771.652,0,0,0,0,0.001,-220.231,-157.48, Mounting Type=侧插, Number of Contacts=4P, Number of Ports=1, Protocol Standard="USB 2.0", Supplier=LCSC, Supplier Footprint=插件, SupplierPart=C720523, Symbol=USB-226-BRY
Q1: library part AO3423_C19268144, "漏源电压(Vdss):20V;连续漏极电流(Id):3A;导通电阻(RDS(on)@Vgs,Id):125mΩ@2.5V,2A;功率(Pd):1.55W;阈值电压(Vgs(th)@Id):1.1V@3A;", Continuous Drain Current (Id)=3A, Drain Source On Resistance (RDS(on)@Vgs,Id)=125mΩ@2.5V,2A, Drain Source Voltage (Vdss)=20V, Gate Threshold Voltage (Vgs(th)@Id)=1.1V@3A, Input Capacitance (Ciss@Vds)=520pF@16V, JLCPCB Part Class="Extended Part", LCSC Part Name="耐压:20V 电流:3A", Manufacturer="TECH PUBLIC(台舟)", Operating Temperature=-55℃~+150℃, Power Dissipation (Pd)=1.55W, Reverse Transfer Capacitance (Crss@Vds)=80pF@16V, AddInBom=yes, ConvertToPcb=yes, Datasheet=https://atta.szlcsc.com/upload/public/pdf/source/20231201/DEC71D908761248026A69CF2D48D0084.pdf, Device=AO3423_C19268144, FootprintName=SOT-23-3_L2.9-W1.3-P1.90-LS2.4-BR-3, ManufacturerPart=AO3423, ModelId=c62791f0466c4ae2a892c056b845b0ca聨0819f05c4eef4c71ace90d822a990e87, ModelName=SOT-23-3P_L2.9-W1.3-H1.0-LS2.4-P0.95, ModelTransform=98.425,114.173,0,180,0,0,0.0005,-0.0005,0, Supplier=LCSC, Supplier Footprint=SOT-23, SupplierPart=C19268144, Symbol=AO3423_C19268144
Q2: library part BSN20_C116157, "数量:1个N沟道;漏源电压(Vdss):50V;连续漏极电流(Id):100mA;导通电阻(RDS(on)):10Ω@2.75V,0.2A;耗散功率(Pd):-;阈值电压(Vgs(th)):1.5V@250uA;", Current - Continuous Drain(Id)=100mA, Drain to Source Voltage=50V, Gate Threshold Voltage (Vgs(th))=1.5V@250uA, Input Capacitance(Ciss)=40pF, JLCPCB Part Class="Extended Part", LCSC Part Name="1个N沟道 耐压:50V 电流:0.1A", Manufacturer=SHIKUES(时科), Output Capacitance(Coss)=15pF, Pd - Power Dissipation=-, Reverse Transfer Capacitance (Crss@Vds)=10pF, 3D Model=89cb27a44ab2466697082bb9fd73a7d0聨0819f05c4eef4c71ace90d822a990e87, 3D Model Transform=114.173,110.236,0,90,0,0,0,0,0, AddInBom=yes, ConvertToPcb=yes, Datasheet=https://item.szlcsc.com/datasheet/BSN20/117410.html, Device=BSN20_C116157, FootprintName=SOT-23-3_L2.9-W1.6-P1.90-LS2.8-BR, Manufacturer Part=BSN20, ModelName=SOT-23-3L_L2.9-W1.6-H1.1-LS2.8-P0.95, Number=1个N沟道, RDS(on)=10Ω@2.75V,0.2A, Supplier=LCSC, Supplier Footprint=SOT-23, Supplier Part=C116157, Symbol=BSN20, Type=N沟道
Q3 Q4: library part MMBT3904_C7420353, "晶体管类型:NPN;集电极电流(Ic):200mA;集射极击穿电压(Vceo):40V;耗散功率(Pd):200mW;直流电流增益(hFE):100@10mA,1.0V;", Collector - Emitter Voltage VCEO=40V, Current - Collector Cutoff=100nA, Current - Collector(Ic)=200mA, DC Current Gain=100@10mA,1.0V, Emitter-Base Voltage(Vebo)=6V, JLCPCB Part Class="Extended Part", LCSC Part Name="hFE:100-300，丝印:1AM NPN 电流:200mA 电压:40V", Manufacturer=R+O(宏嘉诚), Operating Temperature=-55℃~+150℃, Pd - Power Dissipation=200mW, Transition frequency(fT)=300MHz, 3D Model=c62791f0466c4ae2a892c056b845b0ca聨0819f05c4eef4c71ace90d822a990e87, 3D Model Transform=98.425,114.173,0,180,0,0,0.0005,-0.0005,0, AddInBom=yes, ConvertToPcb=yes, Datasheet=https://item.szlcsc.com/datasheet/MMBT3904/8397175.html, Device=MMBT3904_C7420353, FootprintName=SOT-23-3_L2.9-W1.3-P1.90-LS2.4-BR, Manufacturer Part=MMBT3904, ModelName=SOT-23-3P_L2.9-W1.3-H1.0-LS2.4-P0.95, Supplier=LCSC, Supplier Footprint=SOT-23, Supplier Part=C7420353, Symbol=MMBT3904_C7420353, Type=NPN, Vce Saturation(VCE(sat))=300mV
R1 R3: library part FRC0402F1182TS, "电阻类型:厚膜电阻;阻值:11.8kΩ;精度:±1%;功率:62.5mW;工作电压:50V;温度系数:±100ppm/℃;", JLCPCB Part Class="Extended Part", LCSC Part Name="11.8kΩ ±1% 62.5mW 厚膜电阻", Manufacturer=FOJAN(富捷), Operating Temperature=-55℃~+155℃, Power(Watts)=62.5mW, Temperature Coefficient=±100ppm/℃, Tolerance=±1%, Voltage-Supply(Max)=50V, 3D Model=98c88bc2b9094f218f3a3e30a7012738聨0819f05c4eef4c71ace90d822a990e87, 3D Model Transform=39.37,19.685,0,0,0,0,0,0,0, AddInBom=yes, ConvertToPcb=yes, Device=FRC0402F1182TS, FootprintName=R0402, Manufacturer Part=FRC0402F1182TS, ModelName=R0402_L1.0-W0.5-H0.4, Supplier=LCSC, Supplier Footprint=0402, Supplier Part=C2929934, Symbol=FRC0402F1182TS, Type=厚膜电阻
R2: library part FRC0402F1503TS, "电阻类型:厚膜电阻;阻值:150kΩ;精度:±1%;功率:62.5mW;工作电压:50V;温度系数:±100ppm/℃;", JLCPCB Part Class="Extended Part", LCSC Part Name="150kΩ ±1% 62.5mW 厚膜电阻", Manufacturer=FOJAN(富捷), Operating Temperature=-55℃~+155℃, Power(Watts)=62.5mW, Temperature Coefficient=±100ppm/℃, Tolerance=±1%, Voltage-Supply(Max)=50V, 3D Model=98c88bc2b9094f218f3a3e30a7012738聨0819f05c4eef4c71ace90d822a990e87, 3D Model Transform=39.37,19.685,0,0,0,0,0,0,0, AddInBom=yes, ConvertToPcb=yes, Device=FRC0402F1503TS, FootprintName=R0402, Manufacturer Part=FRC0402F1503TS, ModelName=R0402_L1.0-W0.5-H0.4, Supplier=LCSC, Supplier Footprint=0402, Supplier Part=C2909320, Symbol=FRC0402F1503TS, Type=厚膜电阻
R4: library part 0402WGF3302TCE, "电阻类型:厚膜电阻;阻值:33kΩ;精度:±1%;功率:62.5mW;最大工作电压:50V;温度系数:±100ppm/℃;", JLCPCB Part Class="Basic Part", LCSC Part Name="33kΩ ±1% 62.5mW 厚膜电阻", Manufacturer=UNI-ROYAL(厚声), Operating Temperature Range=-55℃~+155℃, Overload Voltage (Max)=50V, Power(Watts)=62.5mW, Temperature Coefficient=±100ppm/℃, Tolerance=±1%, 3D Model=98c88bc2b9094f218f3a3e30a7012738聨0819f05c4eef4c71ace90d822a990e87, 3D Model Transform=39.37,19.685,0,0,0,0,0,0,0, AddInBom=yes, ConvertToPcb=yes, Datasheet=https://atta.szlcsc.com/upload/public/pdf/source/20200306/C422600_1E6D84923E4A46A82E41ADD87F860B5C.pdf, Device=0402WGF3302TCE, FootprintName=R0402, Manufacturer Part=0402WGF3302TCE, ModelName=R0402_L1.0-W0.5-H0.4, Supplier=LCSC, Supplier Footprint=0402, Supplier Part=C25779, Symbol=0402WGF3302TCE, Type=厚膜电阻
R5: library part "FRC1206J1R0 TS", "电阻类型:厚膜电阻;阻值:1Ω;精度:±5%;功率:250mW;工作电压:200V;温度系数:±200ppm/℃;", JLCPCB Part Class="Extended Part", LCSC Part Name="1Ω ±5% 250mW 厚膜电阻", Manufacturer=FOJAN(富捷), Operating Temperature=-55℃~+155℃, Power(Watts)=250mW, Temperature Coefficient=±200ppm/℃, Tolerance=±5%, Voltage-Supply(Max)=200V, AddInBom=yes, ConvertToPcb=yes, Datasheet=https://item.szlcsc.com/datasheet/FRC1206J1R0%2520TS/3180955.html, Device="FRC1206J1R0 TS", FootprintName=R1206, ManufacturerPart="FRC1206J1R0 TS", ModelId=89a1f13db2384da588040e0b3c55bf66聨0819f05c4eef4c71ace90d822a990e87, ModelName=R1206_L3.2-W1.6-H0.6, ModelTransform=125.984,62.992,0,0,0,0,0,0,0, Supplier=LCSC, Supplier Footprint=1206, Symbol="FRC1206J1R0 TS", Type=厚膜电阻
R6 R52: library part "FRC1206P000 TS", "电阻类型:厚膜电阻;阻值:0Ω;精度:±5%;功率:250mW;工作电压:200V;", JLCPCB Part Class="Extended Part", LCSC Part Name="0Ω ±5% 250mW 厚膜电阻", Manufacturer=FOJAN(富捷), Operating Temperature=-55℃~+155℃, Power(Watts)=250mW, Tolerance=±5%, Voltage-Supply(Max)=200V, AddInBom=yes, ConvertToPcb=yes, Device="FRC1206P000 TS", FootprintName=R1206, ModelName=R1206_L3.2-W1.6-H0.6, Supplier=LCSC, Supplier Footprint=1206, Symbol="FRC1206P000 TS", Type=厚膜电阻
  R6: ManufacturerPart="FRC1206P000 TS", ModelId=89a1f13db2384da588040e0b3c55bf66聨0819f05c4eef4c71ace90d822a990e87, ModelTransform=125.984,62.992,0,0,0,0,0,0,0
  R52: 3D Model=89a1f13db2384da588040e0b3c55bf66聨0819f05c4eef4c71ace90d822a990e87, 3D Model Transform=125.984,62.992,0,0,0,0,0,0,0, Manufacturer Part="FRC1206P000 TS"
R7 R8 R12 R13 R15 R21 R22 R23 R28 R29 R36 R37 R50: library part "FRC0402P000 TS", "电阻类型:厚膜电阻;阻值:0Ω;精度:±5%;功率:62.5mW;工作电压:50V;", JLCPCB Part Class="Extended Part", LCSC Part Name="0Ω ±5% 62.5mW 厚膜电阻", Manufacturer=FOJAN(富捷), Operating Temperature=-55℃~+155℃, Power(Watts)=62.5mW, Tolerance=±5%, Voltage-Supply(Max)=50V, AddInBom=yes, ConvertToPcb=yes, Device="FRC0402P000 TS", FootprintName=R0402, ModelName=R0402_L1.0-W0.5-H0.4, Supplier=LCSC, Supplier Footprint=0402, Symbol="FRC0402P000 TS", Type=厚膜电阻
  R7 R8 R12 R13 R15 R28 R29: ManufacturerPart="FRC0402P000 TS", ModelId=98c88bc2b9094f218f3a3e30a7012738聨0819f05c4eef4c71ace90d822a990e87, ModelTransform=39.37,19.685,0,0,0,0,0,0,0, SupplierPart=C2906877
  R21 R22 R23 R36 R37 R50: 3D Model=98c88bc2b9094f218f3a3e30a7012738聨0819f05c4eef4c71ace90d822a990e87, 3D Model Transform=39.37,19.685,0,0,0,0,0,0,0, Manufacturer Part="FRC0402P000 TS", Supplier Part=C2906877
R9 R11 R14 R16 R17 R18 R19 R20: library part RC0402FR-0710KL, "电阻类型:厚膜电阻;阻值:10kΩ;精度:±1%;功率:62.5mW;工作电压:50V;温度系数:±100ppm/℃;", JLCPCB Part Class="Extended Part", LCSC Part Name="厚膜电阻 10kΩ ±1% 62.5mW", Manufacturer=YAGEO(国巨), Operating Temperature=-55℃~+155℃, Power(Watts)=62.5mW, Temperature Coefficient=±100ppm/℃, Tolerance=±1%, Voltage-Supply(Max)=50V, AddInBom=yes, ConvertToPcb=yes, Datasheet=https://item.szlcsc.com/datasheet/RC0402FR-0710KL/61542.html, Device=RC0402FR-0710KL, FootprintName=R0402, ModelName=R0402_L1.0-W0.5-H0.4, Supplier=LCSC, Supplier Footprint=0402, Symbol=RC0402FR-0710KL, Type=厚膜电阻
  R9 R11 R14 R16: ManufacturerPart=RC0402FR-0710KL, ModelId=98c88bc2b9094f218f3a3e30a7012738聨0819f05c4eef4c71ace90d822a990e87, ModelTransform=39.37,19.685,0,0,0,0,0,0,0, SupplierPart=C60490
  R17 R18 R19 R20: 3D Model=98c88bc2b9094f218f3a3e30a7012738聨0819f05c4eef4c71ace90d822a990e87, 3D Model Transform=39.37,19.685,0,0,0,0,0,0,0, Manufacturer Part=RC0402FR-0710KL, Supplier Part=C60490
R10 R24 R25: library part RT0402BRD07100KL, "电阻类型:薄膜电阻;阻值:100kΩ;精度:±0.1%;功率:62.5mW;最大工作电压:50V;温度系数:±25ppm/℃;", JLCPCB Part Class="Extended Part", LCSC Part Name="薄膜电阻 100kΩ ±0.1% 62.5mW", Manufacturer=YAGEO(国巨), Operating Temperature Range=-55℃~+155℃, Overload Voltage (Max)=50V, Power(Watts)=62.5mW, Temperature Coefficient=±25ppm/℃, Tolerance=±0.1%, AddInBom=yes, ConvertToPcb=yes, Datasheet=https://atta.szlcsc.com/upload/public/pdf/source/20210326/C852472_6283D268A9C33EA67274729CC55E28B1.pdf, Device=RT0402BRD07100KL, FootprintName=R0402, ModelName=R0402_L1.0-W0.5-H0.4, Supplier=LCSC, Supplier Footprint=0402, Symbol=RT0402BRD07100KL, Type=薄膜电阻
  R10: ManufacturerPart=RT0402BRD07100KL, ModelId=98c88bc2b9094f218f3a3e30a7012738聨0819f05c4eef4c71ace90d822a990e87, ModelTransform=39.37,19.685,0,0,0,0,0,0,0, SupplierPart=C852472
  R24 R25: 3D Model=98c88bc2b9094f218f3a3e30a7012738聨0819f05c4eef4c71ace90d822a990e87, 3D Model Transform=39.37,19.685,0,0,0,0,0,0,0, Manufacturer Part=RT0402BRD07100KL, Supplier Part=C852472
R26 R27 R40 R41: library part 0402WGF3300TCE, "电阻类型:厚膜电阻;阻值:330Ω;精度:±1%;功率:62.5mW;工作电压:50V;温度系数:±100ppm/℃;", JLCPCB Part Class="Basic Part", LCSC Part Name="330Ω ±1% 62.5mW 厚膜电阻", Manufacturer=UNI-ROYAL(厚声), Operating Temperature=-55℃~+155℃, Power(Watts)=62.5mW, Temperature Coefficient=±100ppm/℃, Tolerance=±1%, Voltage-Supply(Max)=50V, 3D Model=98c88bc2b9094f218f3a3e30a7012738聨0819f05c4eef4c71ace90d822a990e87, 3D Model Transform=39.37,19.685,0,0,0,0,0,0,0, AddInBom=yes, ConvertToPcb=yes, Datasheet=https://item.szlcsc.com/datasheet/0402WGF3300TCE/25847.html, Device=0402WGF3300TCE, FootprintName=R0402, Manufacturer Part=0402WGF3300TCE, ModelName=R0402_L1.0-W0.5-H0.4, Supplier=LCSC, Supplier Footprint=0402, Supplier Part=C25104, Symbol=0402WGF3300TCE, Type=厚膜电阻
R30 R42 R43 R44 R45: library part 0603WAF750JT5E, "电阻类型:厚膜电阻;阻值:75Ω;精度:±1%;功率:100mW;工作电压:75V;温度系数:±100ppm/℃;", JLCPCB Part Class="Basic Part", LCSC Part Name="75Ω ±1% 100mW 厚膜电阻", Manufacturer=UNI-ROYAL(厚声), Operating Temperature=-55℃~+155℃, Power(Watts)=100mW, Temperature Coefficient=±100ppm/℃, Tolerance=±1%, Voltage-Supply(Max)=75V, AddInBom=yes, ConvertToPcb=yes, Datasheet=https://item.szlcsc.com/datasheet/0603WAF750JT5E/4682.html, Device=0603WAF750JT5E, FootprintName=R0603, ModelName=R0603, Supplier=LCSC, Supplier Footprint=0603, Symbol=0603WAF750JT5E, Type=厚膜电阻
  R30: 3D Model=fc143cca1e79419f9cd78b61e9279f08聨0819f05c4eef4c71ace90d822a990e87, 3D Model Transform=31.8897,63.7794,0,90,0,0,0,0,0, Manufacturer Part=0603WAF750JT5E, Supplier Part=C4275
  R42 R43 R44 R45: ManufacturerPart=0603WAF750JT5E, ModelId=fc143cca1e79419f9cd78b61e9279f08聨0819f05c4eef4c71ace90d822a990e87, ModelTransform=31.8897,63.7794,0,90,0,0,0,0,0, SupplierPart=C4275
R31 R32 R33 R34 R35: library part FRC0402F3002TS, "电阻类型:厚膜电阻;阻值:30kΩ;精度:±1%;功率:62.5mW;工作电压:50V;温度系数:±100ppm/℃;", JLCPCB Part Class="Extended Part", LCSC Part Name="30kΩ ±1% 62.5mW 厚膜电阻", Manufacturer=FOJAN(富捷), Operating Temperature=-55℃~+155℃, Power(Watts)=62.5mW, Temperature Coefficient=±100ppm/℃, Tolerance=±1%, Voltage-Supply(Max)=50V, AddInBom=yes, ConvertToPcb=yes, Device=FRC0402F3002TS, FootprintName=R0402, ManufacturerPart=FRC0402F3002TS, ModelId=98c88bc2b9094f218f3a3e30a7012738聨0819f05c4eef4c71ace90d822a990e87, ModelName=R0402_L1.0-W0.5-H0.4, ModelTransform=39.37,19.685,0,0,0,0,0,0,0, Supplier=LCSC, Supplier Footprint=0402, SupplierPart=C2909347, Symbol=FRC0402F3002TS, Type=厚膜电阻
R38: library part FRC0402F33R0TS, "电阻类型:厚膜电阻;阻值:33Ω;精度:±1%;功率:62.5mW;工作电压:50V;温度系数:±100ppm/℃;", JLCPCB Part Class="Extended Part", LCSC Part Name="33Ω ±1% 62.5mW 厚膜电阻", Manufacturer=FOJAN(富捷), Operating Temperature=-55℃~+155℃, Power(Watts)=62.5mW, Temperature Coefficient=±100ppm/℃, Tolerance=±1%, Voltage-Supply(Max)=50V, AddInBom=yes, ConvertToPcb=yes, Device=FRC0402F33R0TS, FootprintName=R0402, ManufacturerPart=FRC0402F33R0TS, ModelId=98c88bc2b9094f218f3a3e30a7012738聨0819f05c4eef4c71ace90d822a990e87, ModelName=R0402_L1.0-W0.5-H0.4, ModelTransform=39.37,19.685,0,0,0,0,0,0,0, Supplier=LCSC, Supplier Footprint=0402, SupplierPart=C2906868, Symbol=FRC0402F33R0TS, Type=厚膜电阻
R39: library part 0402WGF220JTCE, "电阻类型:厚膜电阻;阻值:22Ω;精度:±1%;功率:62.5mW;最大工作电压:50V;温度系数:±100ppm/℃;", JLCPCB Part Class="Basic Part", LCSC Part Name="22Ω ±1% 62.5mW 厚膜电阻", Manufacturer=UNI-ROYAL(厚声), Operating Temperature Range=-55℃~+155℃, Overload Voltage (Max)=50V, Power(Watts)=62.5mW, Temperature Coefficient=±100ppm/℃, Tolerance=±1%, AddInBom=yes, ConvertToPcb=yes, Datasheet=https://atta.szlcsc.com/upload/public/pdf/source/20200306/C422600_1E6D84923E4A46A82E41ADD87F860B5C.pdf, Device=0402WGF220JTCE, FootprintName=R0402, ManufacturerPart=0402WGF220JTCE, ModelId=98c88bc2b9094f218f3a3e30a7012738聨0819f05c4eef4c71ace90d822a990e87, ModelName=R0402_L1.0-W0.5-H0.4, ModelTransform=39.37,19.685,0,0,0,0,0,0,0, Supplier=LCSC, Supplier Footprint=0402, SupplierPart=C25092, Symbol=0402WGF220JTCE, Type=厚膜电阻
R46: library part FRC0402F2002TS, "电阻类型:厚膜电阻;阻值:20kΩ;精度:±1%;功率:62.5mW;工作电压:50V;温度系数:±100ppm/℃;", JLCPCB Part Class="Extended Part", LCSC Part Name="20kΩ ±1% 62.5mW 厚膜电阻", Manufacturer=FOJAN(富捷), Operating Temperature=-55℃~+155℃, Power(Watts)=62.5mW, Temperature Coefficient=±100ppm/℃, Tolerance=±1%, Voltage-Supply(Max)=50V, 3D Model=98c88bc2b9094f218f3a3e30a7012738聨0819f05c4eef4c71ace90d822a990e87, 3D Model Transform=39.37,19.685,0,0,0,0,0,0,0, AddInBom=yes, ConvertToPcb=yes, Datasheet=https://item.szlcsc.com/datasheet/FRC0402F2002TS/3180380.html, Device=FRC0402F2002TS, FootprintName=R0402, Manufacturer Part=FRC0402F2002TS, ModelName=R0402_L1.0-W0.5-H0.4, Supplier=LCSC, Supplier Footprint=0402, Supplier Part=C2906867, Symbol=FRC0402F2002TS, Type=厚膜电阻
R47 R48: library part 0402WGF1801TCE, "电阻类型:厚膜电阻;阻值:1.8kΩ;精度:±1%;功率:62.5mW;工作电压:50V;温度系数:±100ppm/℃;", JLCPCB Part Class="Extended Part", LCSC Part Name="1.8kΩ ±1% 62.5mW 厚膜电阻", Manufacturer=UNI-ROYAL(厚声), Operating Temperature=-55℃~+155℃, Power(Watts)=62.5mW, Temperature Coefficient=±100ppm/℃, Tolerance=±1%, Voltage-Supply(Max)=50V, 3D Model=98c88bc2b9094f218f3a3e30a7012738聨0819f05c4eef4c71ace90d822a990e87, 3D Model Transform=39.37,19.685,0,0,0,0,0,0,0, AddInBom=yes, ConvertToPcb=yes, Datasheet=https://item.szlcsc.com/datasheet/0402WGF1801TCE/26614.html, Device=0402WGF1801TCE, FootprintName=R0402, Manufacturer Part=0402WGF1801TCE, ModelName=R0402_L1.0-W0.5-H0.4, Supplier=LCSC, Supplier Footprint=0402, Supplier Part=C25871, Symbol=0402WGF1801TCE, Type=厚膜电阻
R49 R51: library part FRC0402F2702TS, "电阻类型:厚膜电阻;阻值:27kΩ;精度:±1%;功率:62.5mW;工作电压:50V;温度系数:±100ppm/℃;", JLCPCB Part Class="Extended Part", LCSC Part Name="27kΩ ±1% 62.5mW 厚膜电阻", Manufacturer=FOJAN(富捷), Operating Temperature=-55℃~+155℃, Power(Watts)=62.5mW, Temperature Coefficient=±100ppm/℃, Tolerance=±1%, Voltage-Supply(Max)=50V, 3D Model=98c88bc2b9094f218f3a3e30a7012738聨0819f05c4eef4c71ace90d822a990e87, 3D Model Transform=39.37,19.685,0,0,0,0,0,0,0, AddInBom=yes, ConvertToPcb=yes, Device=FRC0402F2702TS, FootprintName=R0402, Manufacturer Part=FRC0402F2702TS, ModelName=R0402_L1.0-W0.5-H0.4, Supplier=LCSC, Supplier Footprint=0402, Supplier Part=C2933084, Symbol=FRC0402F2702TS, Type=厚膜电阻
RF1: library part BWIPX-1-001E, "连接器类型:板端;接口类型:内针;端口数量:1;接口直径:2mm;接口长度/高度:1.25mm;频率:6GHz;射频系列:IPEX;阻抗:50Ω;样式:-;工作温度:-40℃~+85℃;", JLCPCB Part Class="Extended Part", LCSC Part Name="内针 IPEX", Manufacturer="BAT WIRELESS(蝙蝠无线)", Operating Temperature Range=-40℃~+85℃, 3D Model=e9910d1cc3f644ef905f39c3184653d7聨0819f05c4eef4c71ace90d822a990e87, 3D Model Transform=122.047,118.11,0,180,0,0,29.921,0,0, AddInBom=yes, Connector Type=板端, ConvertToPcb=yes, Datasheet=https://item.szlcsc.com/datasheet/BWIPX-1-001E/508501.html, Device=BWIPX-1-001E, FootprintName=IPEX-SMD_BWIPX-1-001E, Impedance=50Ω, Interface=内针, Interface Diameter=2mm, Interface Length/Height=1.25mm, Manufacturer Part=BWIPX-1-001E, ModelName=IPEX-SMD_BWIPX-1-001E, Number of Ports=1, RF Series=IPEX, Style=-, Supplier=LCSC, Supplier Footprint=SMD, Supplier Part=C496552, Symbol=BWIPX-1-001E
RN1: library part 4D03WGJ0000T5E, "电阻器数:4;阻值:0Ω;精度:±5%;单个元件功率:62.5mW;温度系数:±400ppm/℃;", JLCPCB Part Class="Extended Part", LCSC Part Name="0Ω ±5%", Manufacturer=UNI-ROYAL(厚声), Number of Resistors=4, Power(Watts)=62.5mW, Temperature Coefficient=±400ppm/℃, Tolerance=±5%, AddInBom=yes, ConvertToPcb=yes, Datasheet=https://item.szlcsc.com/datasheet/4D03WGJ0000T5E/2304.html, Device=4D03WGJ0000T5E, FootprintName=RES-ARRAY-SMD_0603-8P-L3.2-W1.6-BL, ManufacturerPart=4D03WGJ0000T5E, ModelId=edf39f9a2dca4b9a94267f442dd4f95a聨0819f05c4eef4c71ace90d822a990e87, ModelName=R0603-8P_L3.2-W1.6-H0.6, ModelTransform=125.984,62.992,0,0,0,0,0,0,0, Number of Pins=8, Supplier=LCSC, Supplier Footprint=0603x4, SupplierPart=C1952, Symbol=4D03WGJ0000T5E
SCREW1 SCREW2 SCREW3 SCREW4 SCREW5: library part M3螺丝, AddInBom=yes, ConvertToPcb=yes, Device=M3螺丝, FootprintName=SIP-1A, Supplier Footprint=插件, Symbol=螺丝孔
STAMP1 STAMP2: library part youpiaokong, AddInBom=yes, ConvertToPcb=yes, Device=youpiaokong, FootprintName=youpiaokong, Symbol=youpiaokong
TP1 TP2 TP3 TP4: library part Test-Point, "Test Point 测试点", AddInBom=yes, ConvertToPcb=yes, Device=Test-Point, FootprintName=Test-Point-0.5mm, Symbol=Test-Point
U1: "功能类型:降压型;工作电压:2.2V~5.5V;输出电压:610mV~5.5V;输出电流:1A;输出类型:可调;", Frequency - Switching=1.5MHz, JLCPCB Part Class="Extended Part", LCSC Part Name="1.5MHz 1.0A 降压转换器", Manufacturer=LOWPOWER(微源半导体), Operating Temperature=-40℃~+85℃@(TA), Output Current=1A, Output Voltage=610mV~5.5V, Quiescent Current=70uA, Voltage - Supply=2.2V~5.5V, 3D Model=0a2a1b8f50944f73965918ad6e5fe167聨0819f05c4eef4c71ace90d822a990e87, 3D Model Transform=114.173,109.636,0,180,0,0,0,0,0, AddInBom=yes, ConvertToPcb=yes, Datasheet=https://item.szlcsc.com/datasheet/LP3220SAB5F/533577.html, Device=LP3220SAB5F, FootprintName=SOT-23-5_L3.0-W1.7-P0.95-LS2.8-BR, Function=降压型, Manufacturer Part=LP3220SAB5F, ModelName=SOT-23-5_L2.9-W1.6-H1.1-LS2.8-P0.95, Number of Outputs=1, Output Type=可调, Supplier=LCSC, Supplier Footprint=SOT-23-5, Supplier Part=C517212, Switch tube (built-in/external)=内置, Symbol=LP3220SAB5F, Synchronous Rectifier=是, Topology=降压式
U2 U3: "输出类型:固定;工作电压:6V;输出电压:3.3V;输出电流:600mA;电源纹波抑制比(PSRR):65dB@(1kHz);输出极性:正极;", JLCPCB Part Class="Extended Part", LCSC Part Name=600mA，超低噪声、超快速CMOS低压差线性稳压器, Manufacturer=LOWPOWER(微源半导体), Operating Temperature=-40℃~+125℃@(Tj), Output Current=600mA, Output Voltage=3.3V, Power Supply Rejection Ratio (PSRR)=65dB@(1kHz), standby current=130uA, Voltage - Supply=6V, Voltage Dropout=480mV@(600mA), AddInBom=yes, ConvertToPcb=yes, Datasheet=https://item.szlcsc.com/datasheet/LP3987H-33B5F/533621.html, Device=LP3987H-33B5F, Features=带使能；过热保护；过流保护, FootprintName=SOT-23-5_L3.0-W1.7-P0.95-LS2.8-BL, ManufacturerPart=LP3987H-33B5F, ModelId=0a2a1b8f50944f73965918ad6e5fe167聨0819f05c4eef4c71ace90d822a990e87, ModelName=SOT-23-5_L2.9-W1.6-H1.1-LS2.8-P0.95, ModelTransform=118.60433,114.173,0,90,0,0,0.0005,0.0005,0, Noise=100uVrms, Number of Outputs=1, Output Configuration=正极, Output Type=固定, Supplier=LCSC, Supplier Footprint=SOT-23-5, SupplierPart=C517256, Symbol=LP3987H-33B5F
U4: "配置:-;接口类型:eMMC 5.1;存储容量:8GB;", Controller Operating Voltage (VCCQ)=2.7V~3.6V；1.7V~1.95V, Controller Stand-By Current=-, JLCPCB Part Class="Extended Part", LCSC Part Name="eMMC 5.1 规格兼容", Manufacturer=SAMSUNG(三星半导体), NAND Operating Voltage (VCCF)=2.7V~3.6V, Operating Temperature=-25℃~+85℃, AddInBom=yes, configuration=-, ConvertToPcb=yes, Datasheet=https://item.szlcsc.com/datasheet/KLM8G1GETF-B041/512098.html, Device=KLM8G1GETF-B041, FootprintName=FBGA-153_L13.0-W11.5-P0.50_KLMAG1JETD-B041, Interface="eMMC 5.1", ManufacturerPart=KLM8G1GETF-B041, Memory Size=8GB, ModelId=e295469cf8df408b9f13391ad06a16e8聨0819f05c4eef4c71ace90d822a990e87, ModelName=FBGA-153_L13.0-W11.5-H1.1-P0.50_KLMAG1JETD-B041, ModelTransform=452.755,511.81,0,0,0,0,0,0,0, NAND Stand-By Current=-, Reading Speed in Sequence=330MB/S, Supplier=LCSC, Supplier Footprint=FBGA-153(11.5x13), SupplierPart=C499918, Symbol=KLM8G1GETF-B041, Writing Speed in Sequence=50MB/S
U5: "存储容量:4Gbit;时钟频率(fc):-;工作电压:2.7V~3.6V;", Clock Frequency=-, JLCPCB Part Class="Extended Part", Manufacturer=micron(镁光), Operating Temperature=0℃~+70℃, Voltage - Supply=2.7V~3.6V, AddInBom=yes, Block Erase Time(tBE)=700us, ConvertToPcb=yes, Data Retention - TDR (Year)=10年, Device=MT29F4G08ABADAWP:D, FootprintName=TSOP-48_L18.5-W12.2-P0.50-LS20.0-TL, Interface=Parallel, LCSC Part Name=MT29F4G08ABADAWP:D, ManufacturerPart=MT29F4G08ABADAWP:D, Memory Size=4Gbit, ModelId=84317263936c4cfc959f23406aa8adae聨0819f05c4eef4c71ace90d822a990e87, ModelName=TSOP-48_L12-W18.4-H1.0-LS20.0-P0.50, ModelTransform=787.89433,472.44,0,0,0,0,0,0,0, Page Program time (TPP)=200us, Program / Erase Cycles=10万次, Standby Supply Current=-, Supplier=LCSC, Supplier Footprint=TSOPI-48, SupplierPart=C78135, Symbol=MT29F4G08ABADAWP:D, Write Cycle Time(tWC)=20ns
U6 U7: "电路结构:单刀双掷;安装方式:弯插;开关颜色:黑色;额定电流:300mA;额定电压:50V;工作寿命:8千次;", Actuator Color=黑色, Current Rating=300mA, JLCPCB Part Class="Extended Part", LCSC Part Name="3脚2两档位SK12D07VG3 1P2T卧式拨动开关,柄长3mm", Manufacturer=hanxia(韩下), Operating Temperature=-25℃~+70℃, Voltage Rating=50V, Actuator Style=矩形柱状, AddInBom=yes, Circuit=单刀双掷, ConvertToPcb=yes, Datasheet=https://item.szlcsc.com/datasheet/HX%2520SK12D07VG3/5774346.html, Device="HX SK12D07VG3", FootprintName=SW-TH_SK12D07VG3, Length=8.7mm, Life=8千次, ManufacturerPart="HX SK12D07VG3", ModelId=951c2d8cae1a45b4bcf1723179613222聨0819f05c4eef4c71ace90d822a990e87, ModelName=SW-TH_SK12D07VG3, ModelTransform=342.519,330.708,0,0,0,0,-0.591,-77.99,-118.11, Mounting Type=弯插, Supplier=LCSC, Supplier Footprint=弯插,8.7x4.7mm, SupplierPart=C5149832, Switch Height=7.4mm, Symbol="HX SK12D07VG3", Termination Style=PC引脚, Width=4.7mm
U11: JLCPCB Part Class="Extended Part", Manufacturer=x-powers, AddInBom=yes, ConvertToPcb=yes, Datasheet=https://item.szlcsc.com/datasheet/XR829%2520module%252024MHz/6196369.html, Device="XR829 module 24MHz", FootprintName=WIRELM-SMD_XR829-MODULE-24MHZ, LCSC Part Name="XR829 module 24MHz", ManufacturerPart="XR829 module 24MHz", ModelId=04a79f9e2d454222904379cc9ddf09c8聨0819f05c4eef4c71ace90d822a990e87, ModelName=WIRELM-SMD_XR829-MODULE-24MHZ, ModelTransform=472.44,472.44,0,0,0,0,-0.004,0,0, Supplier=LCSC, Supplier Footprint=SMD,12x12mm, SupplierPart=C5365288, Symbol="XR829 MODULE 24MHZ"
U12: library part "PM44-11BP T-CND", "匝数比:1CT:1CT;速率:10/100M;功能(POE或非POE):POE;", Isolation Voltage(Vrms)=1.5kV, JLCPCB Part Class="Extended Part", LCSC Part Name=10/100M单端口变压器模块, Manufacturer=CND-tek(磁联达), Operating Temperature=0℃~+70℃, 3D Model=b41a16acba62412c8212b7f795f1fce3聨0819f05c4eef4c71ace90d822a990e87, 3D Model Transform=499.999,370.078,0,0,0,0,0,0,0, AddInBom=yes, ConvertToPcb=yes, Datasheet=https://item.szlcsc.com/datasheet/PM44-11BP%2520T-CND/51383028.html, Device="PM44-11BP T-CND", FootprintName=XFMR-SMD_16P-L12.7-W7.1-P1.27-LS9.4-BL, Function=POE, Manufacturer Part="PM44-11BP T-CND", ModelName=XFMR-SMD_16P-L12.7-W7.1-P1.27-LS9.4-BL, rate=10/100M, Supplier=LCSC, Supplier Footprint=SMD-16P,12.7x7mm, Supplier Part=C49023303, Symbol="PM44-11BP T", Turns Ratio=1CT:1CT
U15: "额定电流:500mA;工作温度:-55℃~+85℃;", Current Rating=500mA, JLCPCB Part Class="Extended Part", Manufacturer=HRS(广濑), Operating Temperature=-55℃~+85℃, Voltage Rating=100V, 3D Model=2760271e6f4b4f45910819c2043a6dc4聨0819f05c4eef4c71ace90d822a990e87, 3D Model Transform=1881.886,224.409,0,0,0,0,-0.002,-0.004,-27.559, AddInBom=yes, ConvertToPcb=yes, Datasheet=https://item.szlcsc.com/datasheet/FX6-100P-0.8SV(71)/5709403.html, Device=FX6-100P-0.8SV(71), FootprintName=CONN-SMD_100P-P0.80_FX6-100P-0.8SV71, LCSC Part Name=FX6-100P-0.8SV(71), Manufacturer Part=FX6-100P-0.8SV(71), ModelName=CONN-SMD_100P-P0.80_FX6-100P-0.8SV71, Supplier=LCSC, Supplier Footprint=SMD-100P, Supplier Part=C5121467, Symbol=FX6-100P-0.8SV(71)
U13: AddInBom=yes, componentDisplayMode=-1, ConvertToPcb=yes, Device=AZ1045-04F, FootprintName=DFN2510-10_L2.5-W1.0-P0.50-BL, OriginFootprint=DFN-10_2r50x1r00-H0r53-P0r50_B, Relevance=|, Symbol=AZ1045-04F

## Nets (pads, with @x,y where several pads share a name; then routed paths per layer and width w, separated by ;. In a path a pad name is that pad's centre, name@x,y a point inside that pad or via, vN(x,y) a via of type N, cw(c..) or ccw(c..) an arc to the next point about the centre after c; other vN are vias at no path point)
+5V: C34.1 C35.2 C36.2 D2.2 D3.2 D10.2 H3.1 J2.1 P1.1 R5.1 R6.2
AGND: C58.2 C59.2 D7.1 D8.1 D9.1 J5.1 J7.1 J8.1 R30.1 R52.1 U15.1 U15.5 U15.7 U15.11 U15.13 U15.17
ANTOUT: C46.1 R36.2 U11.2
AUDIO-L: D8.2 J7.2 R28.2
AUDIO-R: D7.2 J8.2 R29.2
AVCC: C10.2 C11.2 C58.1 C59.1 R7.2 U3.5 U15.2
CPUX-TCK: TP3.1 U15.41
CPUX-TDI: TP1.1 U15.45
CPUX-TDO: TP4.1 U15.49
CPUX-TMS: TP2.1 U15.53
CPUX-URX: Q2.2 R17.1 R21.1 U15.6
CPUX-UTX: J3.3 U15.61
DCIN: D1.1 ESD1.2 J1.1 J2.2 R6.1
EMMC-CLK: U4.M6 U15.70
EMMC-CMD: U4.M5 U15.74
EMMC-D0: U4.A3 U15.87
EMMC-D1: U4.A4 U15.83
EMMC-D2: U4.A5 U15.79
EMMC-D3: U4.B2 U15.86
EMMC-D4: U4.B3 U15.90
EMMC-D5: U4.B4 U15.81
EMMC-D6: U4.B5 U15.78
EMMC-D7: U4.B6 U15.75
EMMC-RST: U4.K5 U15.38
EPHY-LINK-LED: C56.2 J6.12
EPHY-RXN: RN1.4 U15.100
EPHY-RXP: RN1.3 U15.98
EPHY-SPD-LED: C55.2 J6.10
EPHY-TXN: RN1.2 U15.97
EPHY-TXP: RN1.1 U15.95
GND: C1.1 C2.1 C3.1 C4.1 C6.1 C7.1 C8.1 C9.1 C10.1 C11.1 C12.1 C13.1 C14.1 C15.1 C16.1 C17.2 C18.2 C19.2 C20.2 C21.2 C22.2 C23.2 C24.2 C25.2 C26.2 C27.2 C28.2 C29.2 C30.2 C31.2 C32.2 C33.2 C34.2 C35.1 C36.1 C37.1 C38.1 C39.1 C40.1 C43.1 C44.1 C45.2 C46.2 C47.1 C48.1 C49.1 C50.1 C51.1 C52.2 C53.2 C54.2 C55.1 C56.1 C60.2 C61.2 C62.2 C63.2 C64.2 C65.2 C66.2 C67.2 C68.2 D1.2 D3.1 D4.1 D5.1 D6.2 D11.1 D12.1 D13.1 D14.1 ESD1.1 H1.1 H4.1 J1.2 J1.3 J3.1 J4.2 J6.13 J6.14 J9.5 OSC1.2 P1.4 Q3.2 Q4.2 R4.1 R10.2 R24.1 R25.1 R37.1 R49.1 R52.2 RF1.2 RF1.3 U1.2 U2.2 U3.2 U4.A6 U4.C4 U4.E7 U4.G5 U4.H10 U4.J5 U4.K8 U4.N2 U4.N5 U4.P4 U4.P6 U5.13 U5.25 U5.48 U6.3 U7.3 U11.1 U11.3 U11.20 U11.31 U11.33 U11.36 U15.14 U15.18 U15.22 U15.26 U15.28 U15.30 U15.31 U15.32 U15.33 U15.36 U15.42 U15.57 U15.60 U15.65 U15.66 U15.67 U15.72 U15.73 U15.77 U15.85
HCEC: R50.1 U15.24
HDMI-5V: D10.1 R47.2 R48.2
HPD: D11.2 R46.2
HTX0N: U15.52
HTX0P: U15.56
HTX1N: U15.64
HTX1P: U15.68
HTX2N: U15.76
HTX2P: U15.80
HTXCN: U15.40
HTXCP: U15.44
IR-RX: J4.1 R22.1 U15.82
IR-RX-1: C39.2 J9.3 R22.2
LED1: C38.2 J4.4 J9.2 R27.2
LED2: C40.2 J4.5 J9.4 R26.2
LINEOUTL: C42.1 U15.3
LINEOUTR: C41.1 U15.9
NALE: U5.17 U15.21
NCE0: U5.9 U15.25
NCE1: U5.10 U15.23
NCLE: U5.16 U15.19
NDQ0: U5.29 U15.63
NDQ1: U5.30 U15.59
NDQ2: U5.31 U15.55
NDQ3: U5.32 U15.51
NDQ4: U5.41 U15.47
NDQ5: U5.42 U15.43
NDQ6: U5.43 U15.39
NDQ7: U5.44 U15.35